# Altium PCB SoM.PcbDoc (part 3 of 5)
Units mm, origin at the board's own origin, x right, y up, seen from the top; angles counter-clockwise.
Board outline 69.6 x 50 mm, 8 copper layers ([1] Signal HS-H, [2] GND, [3] Signal HS-V, [4] GND, [5] POWER, [6] Signal H, [7] GND, [8] Signal V), stack 1.601 mm thick; 537 components, 538 nets, 5734 pads, 0 vias.
Unrouted connection lines stored in the file: 2195.
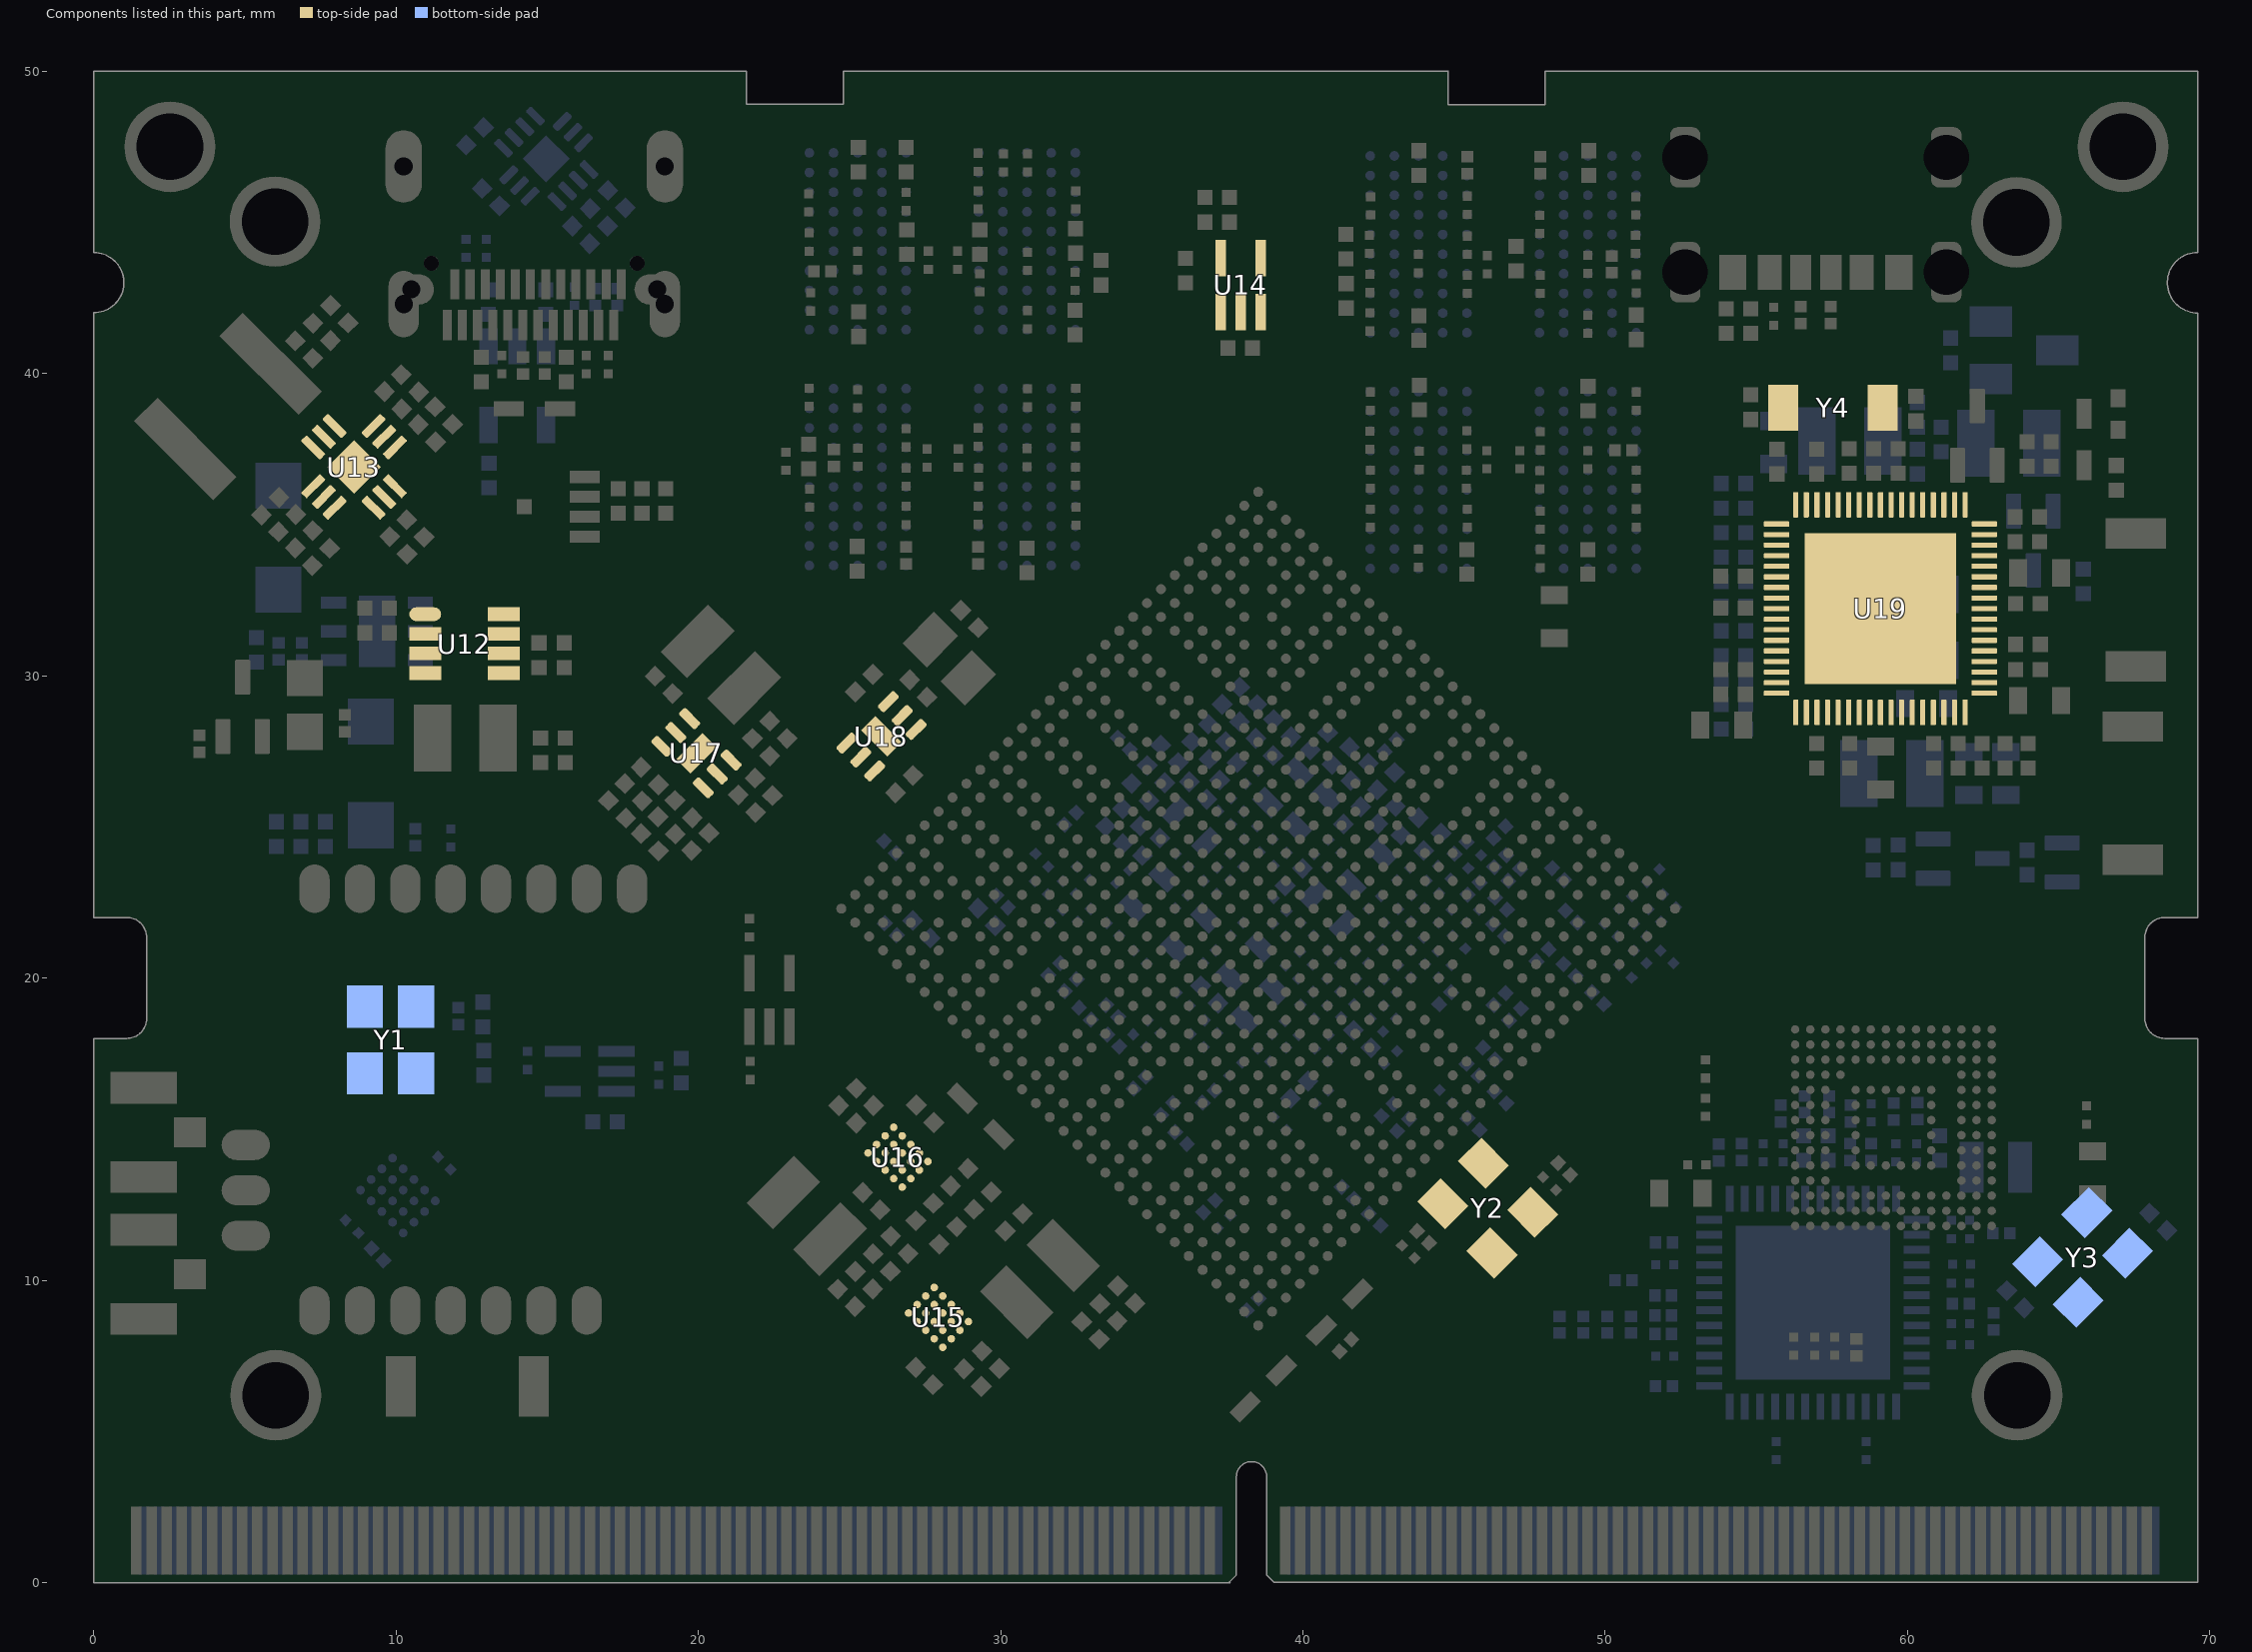
[diagram p9: the components of this part, seen from the top]

## Part data (continued)
U12: library part REG_0.6~5V-5.5V-3A-TSOT-23-8, "Switching Voltage Regulators 3A, 5.5V, 1.2MHz Sync Stp-Dwn Swtchr", Case/Package=TSOT-23-8, Manufacturer="Monolithic Power Systems (MPS)", Manufacturer Part Number=MP2143DJ-LF-Z, Supplier-1=Mouser
U13: library part REG_3.3V-26V-8A-QFN-12, "Switching Voltage Regulators 26V Fixed 3.3 V-8A Sync Buck Converter", Case/Package=QFN-12, Manufacturer="Monolithic Power Systems (MPS)", Manufacturer Part Number=NB680GD-Z, Supplier-1=Mouser
U14: library part REG_3.3V-5.5V-300mA-SC-70-5, "SC-70-5 Dropout Regulators(LDO) RoHS", Case/Package=SC-70-5, Manufacturer="Richtek Tech", Manufacturer Part Number=RT9193-33PU5, Supplier-1=LCSC
U15 U16: library part IC_SYR838PKC, "Step-Down Positive Programmable 1 6A 2.4MHz CSP1.56*1.96-20 DC-DC Converters RoHS", Case/Package=CSP1.56*1.96-20, Manufacturer="Silergy Corp", Manufacturer Part Number=SYR838PKC, Supplier-1=LCSC
U17 U18: library part REG-ADJ_5.5V-5.5V-1A-6-WDFN, "Buck Switching Regulator IC Positive Adjustable 0.6V 1 Output 1A 6-WDFN Exposed Pad", Case/Package=6-WDFN, Manufacturer="Richtek USA Inc.", Manufacturer Part Number=RT8010GQW, Supplier-1=Digikey
U19: library part IC_RK808-D-QFN68, "The RK808 is a complete power supply solution for Portable systems.", Case/Package=QFN68, Manufacturer=Rockchip, Manufacturer Part Number=RK808-D, Supplier-1=Rockchip
Y1: library part XTAL_ECS-327MVATX-2-CN-TR, "32.768kHz XO (Standard) CMOS Oscillator 1.6V ~ 3.6V Enable/Disable 4-SMD, No Lead", Alternate Part Number-1=NA, Case/Package=SMD-4, Manufacturer="ECS INC", Category=Crystal, Manufacturer Part Number=ECS-327MVATX-3-CN-TR, Number of Pins=4, Supplier Part Number-1=ECS-327MVATX-3-CN-TR, Supplier-1=Digikey
Y2 Y3: library part XTAL_24Mhz-12pF-4-SMD, "24MHz ±20ppm Crystal 12pF 50 Ohms 4-SMD, No Lead", Case/Package=SMD, Manufacturer="Abracon LLC", Manufacturer Part Number=ABM8AIG-24.000MHZ-12-2Z-T3, Supplier-1=Digikey
Y4: library part XTAL_32.768Khz-22pF-SMD, "32.768kHz ±20ppm Crystal 12pF 80 kOhms 2-SMD, No Lead", Case/Package=0603, Manufacturer=Ecliptek, Manufacturer Part Number=ECS-.327-6-34RR-TR, Supplier-1=Digikey